# Allegro board 180-10114-04.brd
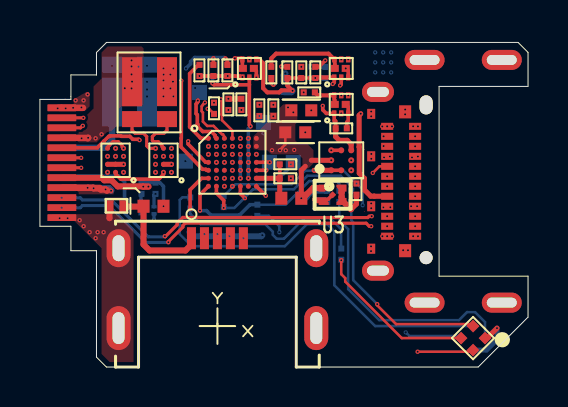
[diagram p0: board, top side]
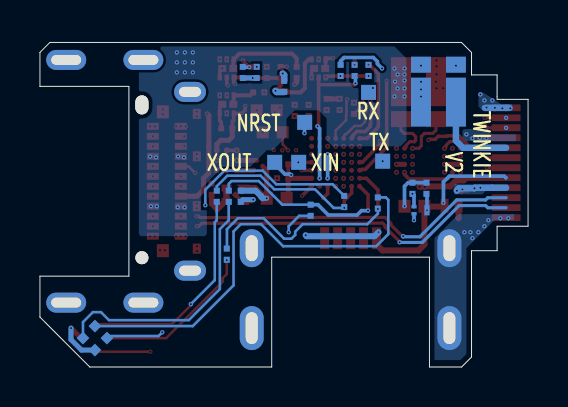
[diagram p1: board, bottom side, seen from below]

Outline 24.44 x 16.25 mm; copper layers: TOP, GND1, SIGNAL_1, SIGNAL_2, PWR1, BOTTOM. Coordinates in mm from the lower left corner of the outline.
Outline path: 0,13.4 1.55,13.4 1.55,14.62 2.83,14.62 2.83,14.62 2.83,15.75 3.33,16.25 23.94,16.25 24.44,15.75 24.44,14.05 19.99,14.05 19.99,4.55 24.44,4.55 24.44,2.5 21.94,0 12.84,0 12.84,5.5 4.94,5.5 4.94,0 3.33,0 2.83,0.5 2.83,5.83 1.55,5.83 1.55,7.05 0,7.05 0,13.4

## Design rules (mm)
net group DIFFPAIR0: nets USB_C_SSRX2_N USB_C_SSRX2_P
net group DIFFPAIR1: nets USB_C_DM USB_C_DP
net group DIFFPAIR2: nets USB_C_SSTX1_N USB_C_SSTX1_P
net group DIFFPAIR3: nets USB_C_CC2_N USB_C_CC2_P
net group DIFFPAIR4: nets USB_C_VBUS_N USB_C_VBUS_P
net group DIFFPAIR5: nets USB_B_DM USB_B_DP
net group DIFFPAIR6: nets USB_C_SSTX2_N USB_C_SSTX2_P
net group DIFFPAIR7: nets USB_C_SSRX1_N USB_C_SSRX1_P

## Placement (name value [footprint] x y rotation side)
C1  -  [CAPC05025X13N]  15.85 8.91 90 top
C2  -  [CAPC1005X71N]  13.09 12.85 0 top
C3  -  [CAPC1005X71N]  12.79 11.75 0 top
C4  -  [CAPC05025X13N]  14.39 8.55 270 bottom
C5  -  [CAPC05025X13N]  11.69 12.85 90 top
C6  -  [CAPC05025X13N]  8.72 12.95 90 top
C7  -  [CAPC05025X13N]  12.29 9.45 0 top
C8  -  [CAPC05025X13N]  12.29 10.15 0 top
CN1  -  [MOLEX_SD-47642-001-5N]  8.89 3.4 0 top
D1  -  [DIOM_1-075X0-675_0-53]  3.83 8.07 180 top
DS1  RGB  [LED_SMLP34RGB2W]  21.69 1.45 315 bottom
DS2  RGB  [LED_SMLP34RGB2W]  21.69 1.45 315 top
FB1  -  [FBC1005X50N]  12.59 8.45 180 top
FB2  -  [FBC1005X50N]  5.69 8.05 0 top
J1  -  [NEWARK_PLUG]  0.94 7.48 0 top
J2  -  [MID-MOUNT-DUAL_SMT]  17.39 6.55 270 top
NOREF  -  []  5.48 9.51 0 top
NOREF#2  -  []  14.76 14.95 0 top
NOREF#3  -  []  5.48 11.19 270 top
NOREF#4  -  []  6.59 10.95 270 top
NOREF#5  -  []  0.91 13.4 90 top
NOREF#6  -  []  0 7.05 90 top
NOREF#7  -  []  3.08 9.51 0 top
NOREF#8  -  []  19.01 0 90 top
NOREF#9  -  []  14.2 11.06 0 top
NOREF#10  -  []  16.93 4.83 90 top
NOREF#11  -  []  15.66 12.62 90 top
NOREF#12  -  []  4.19 10.95 270 top
NOREF#13  -  []  19.99 4.55 90 top
NOREF#14  -  []  3.48 8.07 0 top
NOREF#15  -  []  19.99 9.24 0 top
NOREF#16  -  []  6.18 14.91 0 top
NOREF#17  -  []  14.2 9.64 90 top
NOREF#18  -  []  23.13 3.23 90 top
NOREF#19  -  []  3.61 15.14 0 top
NOREF#20  -  []  3.08 11.19 270 top
NOREF#21  -  []  4.61 12.41 90 top
NOREF#22  -  []  0.95 13.4 90 top
NOREF#23  -  []  19.26 3.23 0 top
NOREF#24  -  []  0.21 13.85 0 top
NOREF#25  -  []  11.06 15.48 270 top
NOREF#26  -  []  8.44 9.05 90 top
NOREF#27  -  []  4.61 15.45 90 top
NOREF#28  -  []  14.74 12.7 90 top
NOREF#29  -  []  1.55 14.54 0 top
NOREF#30  -  []  4.61 12.41 0 top
NOREF#31  -  []  9.91 15.48 0 top
NOREF#32  -  []  15.66 14.42 90 top
NOREF#33  -  []  14.74 14.5 90 top
NOREF#34  -  []  19.34 5.48 90 top
NOREF#35  -  []  14.51 15.48 0 top
NOREF#36  -  []  3.61 13.26 90 top
NOREF#37  -  []  17.39 6.55 0 top
NOREF#38  -  []  2.83 1.11 0 top
NOREF#39  -  []  0 7.75 0 top
NOREF#40  -  []  4.37 7.33 90 top
NOREF#41  -  []  7.98 8.68 0 top
NOREF#42  -  []  10.49 14.5 0 top
NOREF#43  -  []  10.14 15.4 270 top
NOREF#44  -  []  -340.29 -50.77 0 top
NOREF#45  -  []  4.94 5.5 0 top
NOREF#46  -  []  -0.01 12.55 0 top
NOREF#47  -  []  4.61 17.2 0 top
NOREF#48  -  []  14.76 13.15 0 top
NOREF#49  -  []  16.59 8.05 90 top
NOREF#50  -  []  5.71 8.03 270 top
NOREF#51  -  []  3.89 0 90 top
NOREF#52  -  []  10.16 14.95 0 top
NOREF#53  -  []  15.09 14.5 0 top
NOREF#54  -  []  23.06 4.54 90 top
NOREF#55  -  []  5.18 14.96 0 top
NOREF#56  -  []  2.83 15.03 0 top
NOREF#57  -  []  15.09 9.85 0 top
NOREF#58  -  []  1.92 5.83 90 top
NOREF#59  -  []  12.84 0 0 top
NOREF#60  -  []  14.51 13.67 0 top
NOREF#61  -  []  14.59 9.85 0 top
NOREF#62  -  []  11.29 8.68 90 top
NOREF#63  -  []  -402.86 -321.21 0 top
NOREF#64  -  []  5.06 7.85 90 top
NOREF#65  -  []  18.39 225.92 0 top
NOREF#66  -  []  3.61 12.1 90 top
NOREF#67  -  []  1.55 6.16 0 top
NOREF#68  -  []  16.59 10.55 90 top
NOREF#69  -  []  4.37 7.33 0 top
NOREF#70  -  []  15.09 12.7 0 top
Q1  -  [SON035P_1-15X1-05_0-40_8N]  10.49 14.95 90 top
Q2  -  [SON035P_1-15X1-05_0-40_8N]  15.09 13.15 90 top
Q3  -  [SON035P_1-15X1-05_0-40_8N]  15.09 14.95 90 top
Q4  -  [SON350P640X1040X350_3N]  5.39 7.85 270 bottom
R1  -  [RESC1206X75N-4P]  5.49 13.75 270 top
R2  -  [RESC1206X75N-4P]  4.49 13.8 90 bottom
R3  -  [RESC05025X23N]  8.69 14.85 270 top
R4  -  [RESC05025X23N]  14.29 14.75 270 bottom
R5  -  [RESC05025X23N]  9.39 14.85 90 bottom
R6  -  [RESC05025X23N]  13.59 14.75 90 bottom
R7  -  [RESC05025X23N]  7.99 14.85 270 top
R8  -  [RESC05025X23N]  12.21 14.05 270 bottom
R9  -  [RESC05025X23N]  9.39 14.85 90 top
R10  -  [RESC05025X23N]  12.39 14.75 90 top
R11  -  [RESC05025X23N]  7.99 14.85 270 bottom
R12  -  [RESC05025X23N]  13.09 14.75 270 top
R13  -  [RESC05025X23N]  13.49 13.75 0 top
R14  -  [RESC05025X23N]  15.09 11.95 0 top
R15  -  [RESC05025X23N]  11.59 14.75 90 top
R16  -  [RESC05025X23N]  13.79 14.75 90 top
R17  -  [RESC05025X23N]  8.69 14.85 90 bottom
R18  -  [RESC05025X23N]  10.99 12.85 270 top
R19  -  [RESC05025X23N]  14.99 8.55 90 bottom
R20  -  [RESC05025X23N]  9.21 8.29 270 bottom
R21  -  [RESC05025X23N]  7.52 8.21 270 bottom
R22  -  [RESC05025X23N]  5.79 8.95 270 bottom
R23  -  [RESC05025X23N]  5.09 8.95 270 bottom
R24  -  [RESC05025X23N]  9.44 13.15 270 top
R25  -  [RESC05025X23N]  10.09 13.15 270 top
R26  -  [RESC05025X23N]  10.89 7.85 90 bottom
R27  -  [RESC05025X23N]  15.59 8.55 90 bottom
R28  -  [RESC05025X23N]  15.09 5.65 90 bottom
TP1  -  [TP075]  11.49 10.25 180 bottom
TP2  -  [TP075]  12.69 10.25 180 bottom
TP3  -  [TP075]  7.28 10.31 180 bottom
TP4  -  [TP075]  7.99 13.75 180 bottom
TP5  -  [TP075]  11.19 12.25 180 bottom
U1  -  [BGA04P_1-418X1-675_0-625_12N]  6.19 10.35 180 top
U2  -  [BGA04P_1-418X1-675_0-625_12N]  3.79 10.35 180 top
U3  -  [SON65P100X100X40-5N]  14.65 8.62 270 top
U4  -  [BGA040P_3-31X3-14_0-585_49N]  9.64 10.25 0 top
U5  -  [BGA8C050P3X3_1430X1775X0595]  15.09 10.35 90 top

## Library data of the parts
C1 C7 = CAP: alternate symbols: (); part number: CAP_0201-100-10082-00,1UF,6.3V,X5R,20%,150-00004-00
C2 C3 = CAP: alternate symbols: (); part number: CAP_0402-100-10045-00,4.7UF,10V,X5R,20%,150-00039-00
C4-C6 = CAP: alternate symbols: (); part number: CAP_0201-100-10039-00,100NF,10V,X5R,10%,150-00007-00
C8 = CAP: alternate symbols: (); part number: CAP_0201-100-00379-00,10NF,10V,X5R,10%,150-00175-00
CN1 = USB_TYPE_MICRO_B: part number: USB_TYPE_MICRO_B_RA_SMT-MOLEX,47642-0001,140-10205-00
D1 = ZENER: part number: ZENER_DFN1006-5.6V,5MA,0.9V,BZT52C5V6LP-7,150-10082-00,DIODES INC
DS1 DS2 = LED: User Part Number: PARTNUM*; part number: LED_SMLP34-TRI-COLOR,2.2V RED, 3.3V GREEN, 3.2V BLUE TYPICAL,0.2MM,150-10034-00,ROHM,SMLP34RGB2W
FB1 FB2 = FERRITE: alternate symbols: (); part number: FERRITE_0402-104-10036-00,600@100MHZ,0.52OHM,185-00019-00
J1 = USB3_TYPE_C: part number: USB3_TYPE_C_PLUG-FOXCONN,TBD,140-10293-00
J2 = USB3_TYPE_C: part number: USB3_TYPE_C_MIDMOUNT_DUAL_SMT-FOXCONN,UT12123-1A50A-7H,140-10308-00
Q1-Q3 = PMDXB600UNE: part number: PMDXB600UNE_SOT1216-NXP,PMDXB600UNE,150-10050-00
Q4 = NMOS: part number: NMOS_0402-12V,2.1A,0.225OHM,1.06NC,TI,CSD13381F4,151-10044-00
R1 R2 = RES_SENSE: part number: RES_SENSE_RS1206_4P_SWAP-0.015,0.5%,1W,150PPM,RL1632L4-R015-DN,102-13359-00,CYNTEC
R3 R4 = RES: alternate symbols: (); part number: RES_0201-102-12863-00,4.75K,0.050W,1%
R5 R6 = RES: alternate symbols: (); part number: RES_0201-102-13067-00,1K,0.050W,1%
R7 R8 = RES: alternate symbols: (); part number: RES_0201-102-12797-00,12.1K,0.050W,1%
R9 R10 = RES: alternate symbols: (); part number: RES_0201-102-13135-00,5.11K,0.050W,1%
R11 R12 = RES: alternate symbols: (); part number: RES_0201-102-13216-00,35.7K,0.050W,1%
R13 R15 = RES: alternate symbols: (); part number: RES_0201-102-12868-00,200,0.050W,1%
R14 R16 = RES: alternate symbols: (); part number: RES_0201-102-12867-00,100,0.050W,1%
R17 R18 = RES: alternate symbols: (); part number: RES_0201-102-13305-00,301K,0.050W,1%
R19 R26 = RES: alternate symbols: (); part number: RES_0201-102-13058-00,806,0.050W,1%
R20 R27 = RES: alternate symbols: (); part number: RES_0201-102-13044-00,576,0.050W,1%
R21 R28 = RES: alternate symbols: (); part number: RES_0201-102-13046-00,604,0.050W,1%
R22 R23 = RES: alternate symbols: (); part number: RES_0201-102-13231-00,51.1K,0.050W,1%
R24 R25 = RES: alternate symbols: (); part number: RES_0201-102-13100-00,2.21K,0.050W,1%
TP1-TP5 = TESTPOINT: part number: TESTPOINT_30X30MIL_SMT-160-00003-00,N/A,N/A
U1 U2 = INA231: part number: INA231_BGA12-TI,INA231AIYFFR,110-10493-00
U3 = MIC550X: part number: MIC550X_DFN4-MICREL,MIC5504-3.3YMT,300MA LOW IQ LDO,110-10600-00,3.3V; tolerance: 2.0%
U4 = STM32F072XX: part number: STM32F072XX_WLCSP49-ST MICRO,STM32F072CBY6,110-10525-00
U5 = OPAMP_GENERIC: part number: OPAMP_GENERIC_DUAL_WLCSP8-ANALOG,AD8606ACB,110-10560-00

## Footprints (pads in the part's own frame, mm; a bottom-side part is the same pattern mirrored in y, then rotated)
BGA04P_1-418X1-675_0-625_12N
  round 0.25 smd: A1(-0.4,0.6) A2(0,0.6) A3(0.4,0.6) B1(-0.4,0.2) B2(0,0.2) B3(0.4,0.2) C1(-0.4,-0.2) C2(0,-0.2) C3(0.4,-0.2) D1(-0.4,-0.6) D2(0,-0.6) D3(0.4,-0.6)
BGA8C050P3X3_1430X1775X0595
  round 0.3 smd: A1(-0.5,0.5) A2(0,0.5) A3(0.5,0.5) B1(-0.5,0) B3(0.5,0) C1(-0.5,-0.5) C2(0,-0.5) C3(0.5,-0.5)
BGA040P_3-31X3-14_0-585_49N
  round 0.25 smd: A1(-1.2,1.2) A2(-0.8,1.2) A3(-0.4,1.2) A4(0,1.2) A5(0.4,1.2) A6(0.8,1.2) A7(1.2,1.2) B1(-1.2,0.8) B2(-0.8,0.8) B3(-0.4,0.8) B4(0,0.8) B5(0.4,0.8) B6(0.8,0.8) B7(1.2,0.8) C1(-1.2,0.4) C2(-0.8,0.4) C3(-0.4,0.4) C4(0,0.4) C5(0.4,0.4) C6(0.8,0.4) C7(1.2,0.4) D1(-1.2,0) D2(-0.8,0) D3(-0.4,0) D4(0,0) D5(0.4,0) D6(0.8,0) D7(1.2,0) E1(-1.2,-0.4) E2(-0.8,-0.4) E3(-0.4,-0.4) E4(0,-0.4) E5(0.4,-0.4) E6(0.8,-0.4) E7(1.2,-0.4) F1(-1.2,-0.8) F2(-0.8,-0.8) F3(-0.4,-0.8) F4(0,-0.8) F5(0.4,-0.8) F6(0.8,-0.8) F7(1.2,-0.8) G1(-1.2,-1.2) G2(-0.8,-1.2) G3(-0.4,-1.2) G4(0,-1.2) G5(0.4,-1.2) G6(0.8,-1.2) G7(1.2,-1.2)
CAPC1005X71N
  rect 0.6x0.6 smd: 1(-0.5,0) 2(0.5,0)
CAPC05025X13N
  rect 0.3x0.3 smd: 1(-0.28,0) 2(0.28,0)
DIOM_1-075X0-675_0-53
  rect 0.4x0.7 smd: A(0.35,0) K(-0.35,0)
FBC1005X50N
  rect 0.6x0.65 smd: 1(-0.5,0) 2(0.5,0)
LED_SMLP34RGB2W
  rect 0.45x0.45 smd: 1(0.425,0.425) 2(0.425,-0.425) 3(-0.425,-0.425) 4(-0.425,0.425)
MID-MOUNT-DUAL_SMT
  oval 0.95x0.65 hole 0.95x0.65 unplated: (-6.574,1.95)
  round 0.65 hole 0.65 unplated: (1.075,1.95)
  rect 0.35x0.6 smd: A1(0,0) A2(-0.5,0) A3(-1,0) A4(-1.5,0) A5(-2,0) A6(-2.5,0) A7(-3,0) A8(-3.5,0) A9(-4,0) A10(-4.5,0) A11(-5,0) A12(-5.5,0) B1(-5.5,1.4) B2(-5,1.4) B3(-4.5,1.4) B4(-4,1.4) B5(-3.5,1.4) B6(-3,1.4) B7(-2.5,1.4) B8(-2,1.4) B9(-1.5,1.4) B10(-1,1.4) B11(-0.5,1.4) B12(0,1.4)
  oval 1x1.6 hole 0.5x1.1: G1(-7.225,-0.46) G2(1.724,-0.46)
  oval 1x2 hole 0.5x1.5: G3(3.325,1.875) G4(3.325,5.74) G5(-8.825,1.875) G6(-8.825,5.74)
  rect 0.5x0.4 smd: G7(-6.125,-0.8) G8(-4,-0.8) G9(-1.5,-0.8) G10(0.625,-0.8)
  rect 0.65x0.6 smd: G11(0.725,0.9) G12(-6.225,0.9)
  rect 0.025x0.025 smd: G13(-1.25,-1.15) G14(-4.34,-1.15)
MOLEX_SD-47642-001-5N
  rect 0.45x1.1 smd: 1(-1.3,3.05) 2(-0.65,3.05) 3(0,3.05) 4(0.65,3.05) 5(1.3,3.05)
  oval 1.2x2.2 hole 0.6x1.6: G1(-4.95,-1.45) G2(4.95,-1.45)
  oval 1.2x1.9 hole 0.6x1.3: G3(-4.95,2.55) G4(4.95,2.55)
NEWARK_PLUG
  rect 1.425x0.325 smd: A1(0.163,0) A2(0.163,0.5) A3(0.163,1) A4(0.163,1.5) A5(0.163,2) A6(0.163,2.5) A7(0.163,3) A8(0.163,3.5) A9(0.163,4) A10(0.163,4.5) A11(0.163,5) A12(0.163,5.5) B1(0.163,5.5) B2(0.163,5) B3(0.163,4.5) B4(0.163,4) B5(0.163,3.5) B6(0.163,3) B7(0.163,2.5) B8(0.163,2) B9(0.163,1.5) B10(0.163,1) B11(0.163,0.5) B12(0.163,0)
RESC1206X75N-4P
  rect 2.45x1 smd: 1(-0.537,0.875) 2(-0.537,-0.875)
  rect 0.8x1 smd: 3(1.337,-0.875) 4(1.337,0.875)
RESC05025X23N
  rect 0.3x0.3 smd: 1(-0.28,0) 2(0.28,0)
SON035P_1-15X1-05_0-40_8N
  rect 0.3x0.22 smd: 1(-0.452,0.35) 2(-0.452,0) 3(-0.452,-0.35) 4(0.452,-0.35) 5(0.452,0) 6(0.452,0.35)
  rect 0.35x0.4 smd: 7(0,0.325) 8(0,-0.225)
SON65P100X100X40-5N
  custom 0.35x0.64 smd: 1(-0.335,-0.375)
  custom 0.35x0.5 smd: 2(0.335,-0.445) 3(0.335,0.445) 4(-0.335,0.445)
  rect 0.25x0.25 smd rot 135: 5(0,0)
SON350P640X1040X350_3N
  rect 0.51x0.26 smd: D(0,0.325)
  rect 0.16x0.26 smd: G(-0.175,-0.325) S(0.175,-0.325)
TP075
  rect 0.75x0.75 smd: 1(0,0)

## Nets
GND: C1.2 C2.2 C3.2 C4.2 C5.2 C6.2 C7.2 C8.2 CN1.5(GND) CN1.G1 CN1.G2 CN1.G3 CN1.G4 D1.A J1.A1(GND1) J1.A12(GND2) J1.B1(GND3) J1.B12(GND4) J2.A1(GND1) J2.A12(GND2) J2.B1(GND3) J2.B12(GND4) J2.G1(SHIELD1) J2.G2(SHIELD2) J2.G3(SHIELD3) J2.G4(SHIELD4) J2.G5(SHIELD5) J2.G6(SHIELD6) J2.G7(SHIELD7) J2.G8(SHIELD8) J2.G9(SHIELD9) J2.G10(SHIELD10) J2.G11(SHIELD11) J2.G12(SHIELD12) Q2.4(S2) Q3.4(S2) Q4.S R17.2 R18.2 U1.B3(A0) U1.C1(GND) U1.C2(NC_C2) U1.C3(A1) U2.C1(GND) U2.C2(NC_C2) U2.C3(A1) U3.2(GND) U3.5(PAD) U4.A6(VSS3) U4.B1(VSS2) U4.B6(NC) U4.D3(VSS1) U4.E6(VSSA) U5.C2(VSS)
VBUS_ALERT_L: U1.A3(ALERT) U4.G3(PB2)
BOOT: Q4.D R23.2 U4.A5(BOOT0)
CC1: Q1.1(S1) Q2.1(S1) R3.2 R5.1 R7.2 R9.1 R11.2 R14.1 U5.C3(IN_P)
CC1_BUF: U4.G7(PA1) U5.A3(OUT) U5.B3(IN_N)
CC1_EN: Q1.2(G1) R17.1 U4.F6(PA0)
CC1_RA: R5.2 U4.D1(PA8)
CC1_RD: R9.2 U4.B4(PB5)
CC1_RP1A5: R7.1 U4.A1(PA14)
CC1_RP3A0: R3.1 U4.A2(PA15)
CC1_RPUSB: R11.1 U4.B3(PA13)
CC1_TX_DATA: Q2.2(G1) U4.A4(PB4)
CC1_TX_EN: Q2.5(G2) U4.G4(PB1)
CC2: Q1.4(S2) Q3.1(S1) R4.2 R6.1 R8.2 R10.1 R12.2 R16.1 U5.C1(IN_P)
CC2_ALERT_L: U2.A3(ALERT) U4.F3(PA7)
CC2_BUF: U4.E4(PA3) U5.A1(OUT) U5.B1(IN_N)
CC2_EN: Q1.5(G2) R18.1 U4.E5(PA2)
CC2_RA: R6.2 U4.E1(PB15)
CC2_RD: R10.2 U4.B5(PB8)
CC2_RP1A5: R8.1 U4.C7(PC14_OSC32_IN)
CC2_RP3A0: R4.1 U4.C6(PC15_OSC32_OUT)
CC2_RPUSB: R12.1 U4.G5(PB0)
CC2_TX_DATA: Q3.2(G1) U4.F4(PA6)
CC2_TX_EN: Q3.5(G2) U4.A3(PB3)
DAC: U4.G6(PA4)
LED_B_L: R21.2 R28.2 U4.F1(PB14)
LED_G_L: R20.2 R27.2 U4.G2(PB11)
LED_R_L: R19.2 R26.2 U4.G1(PB13)
NRST: TP5.1(A) U4.E7(NRST)
OSC_IN: TP1.1(A) U4.D7(PF0_OSC_IN)
OSC_OUT: TP2.1(A) U4.D6(PF1_OSC_OUT)
PP3300: C2.1 C3.1 C4.1 C5.1 C6.1 FB1.1 R13.1 R15.1 R24.1 R25.1 U1.B1(VS) U1.B2(NC_B2) U2.B1(VS) U2.B2(NC_B2) U2.B3(A0) U3.1(OUT) U4.A7(VDD2) U4.B2(VDDIO2) U4.B7(VBAT) U4.F2(VDD1) U5.A2(VDD)
SCL: R24.2 U1.A1(SCL) U2.A1(SCL) U4.C4(PB6)
SDA: R25.2 U1.A2(SDA) U2.A2(SDA) U4.D4(PB7)
TX_CLKIN: U4.C5(PB9) U4.F5(PA5)
UART_RX: TP4.1(A) U4.C2(PA10)
UART_TX: TP3.1(A) U4.D2(PA9)
UNNAMED_2_CAP_I50_1: C7.1 C8.1 FB1.2 U4.F7(VDDA)
UNNAMED_2_LED_I88_BK: DS1.3(BK) R21.1
UNNAMED_2_LED_I88_GK: DS1.4(GK) R20.1
UNNAMED_2_LED_I88_RK: DS1.2(RK) R19.1
UNNAMED_2_LED_I99_BK: DS2.3(BK) R28.1
UNNAMED_2_LED_I99_GK: DS2.4(GK) R27.1
UNNAMED_2_LED_I99_RK: DS2.2(RK) R26.1
UNNAMED_2_PMDXB600UNE_I30_D11: Q2.6(D1_1) Q2.7(D1_2) R13.2
UNNAMED_2_PMDXB600UNE_I31_D21: Q2.3(D2_1) Q2.8(D2_2) R14.2
UNNAMED_2_PMDXB600UNE_I36_D11: Q3.6(D1_1) Q3.7(D1_2) R15.2
UNNAMED_2_PMDXB600UNE_I38_D21: Q3.3(D2_1) Q3.8(D2_2) R16.2
USB_B_DM: CN1.2(D-) U4.C1(PA11)
USB_B_DP: CN1.3(D+) U4.C3(PA12)
USB_B_ID: CN1.4(ID) Q4.G R22.2
USB_B_VBUS: C1.1 DS1.1(CA) DS2.1(CA) FB2.2 R22.1 R23.1 U3.3(EN) U3.4(IN)
USB_B_VBUS_CONN: CN1.1(VBUS) D1.K FB2.1
USB_C_CC1: J1.A5(CC1) J2.A5(CC1) Q1.6(D1_1) Q1.7(D1_2)
USB_C_CC2_N: R2.4(3) U2.D2(VIN_N)
USB_C_CC2_P: R2.3(4) U2.D1(BUS) U2.D3(VIN_P)
USB_C_DM: J1.A7(DM1) J2.A7(DM1) J2.B7(DM2)
USB_C_DP: J1.A6(DP1) J2.A6(DP1) J2.B6(DP2)
USB_C_PLUG_CC2: J1.B5(CC2) R2.2(1)
USB_C_PLUG_VBUS: J1.A4(VBUS1) J1.A9(VBUS2) J1.B4(VBUS3) J1.B9(VBUS4) R1.2(1)
USB_C_RECEP_CC2: J2.B5(CC2) Q1.3(D2_1) Q1.8(D2_2) R2.1(2)
USB_C_RECEP_VBUS: J2.A4(VBUS1) J2.A9(VBUS2) J2.B4(VBUS3) J2.B9(VBUS4) J2.G13(SHIELD13) J2.G14(SHIELD14) R1.1(2)
USB_C_RFU1: J1.A8(RFU1) J2.A8(RFU1)
USB_C_RFU2: J1.B8(RFU2) J2.B8(RFU2)
USB_C_SSRX1_N: J1.B10(SSRX1_N) J2.B10(SSRX1_N)
USB_C_SSRX1_P: J1.B11(SSRX1_P) J2.B11(SSRX1_P)
USB_C_SSRX2_N: J1.A10(SSRX2_N) J2.A10(SSRX2_N)
USB_C_SSRX2_P: J1.A11(SSRX2_P) J2.A11(SSRX2_P)
USB_C_SSTX1_N: J1.A3(SSTX1_N) J2.A3(SSTX1_N)
USB_C_SSTX1_P: J1.A2(SSTX1_P) J2.A2(SSTX1_P)
USB_C_SSTX2_N: J1.B3(SSTX2_N) J2.B3(SSTX2_N)
USB_C_SSTX2_P: J1.B2(SSTX2_P) J2.B2(SSTX2_P)
USB_C_VBUS_N: R1.4(3) U1.D2(VIN_N)
USB_C_VBUS_P: R1.3(4) U1.D1(BUS) U1.D3(VIN_P)

Pads without a net: J1 B6 B7; U4 D5 E2 E3

## Via types
v1: diameter 0.22, hole 0.1, TOP to GND1, 221 vias
v2: diameter 0.22, hole 0.1, GND1 to SIGNAL_1, 176 vias
v3: diameter 0.22, hole 0.1, SIGNAL_1 to SIGNAL_2, 159 vias
v4: diameter 0.22, hole 0.1, SIGNAL_2 to PWR1, 110 vias
v5: diameter 0.22, hole 0.1, PWR1 to BOTTOM, 97 vias

## Routing (per net, layer and track width the routed paths; a pad name or vN(x,y) marks a point on that pad's centre or on a via; arc(x,y) is an arc through that point)
GND: length 5.6
  TOP w0.178: U3.5 14.43,8.4 13.74,8.4 13.74,8.39 13.75,8.39 13.75,8.38 v5(13.76,8.38) 13.85,8.29 U3.2
  TOP w0.3: D1.A 3.48,7.45 3.48,7.45
  TOP w0.32: 2.15,12.98 v5(1.66,12.98) J1.A12 0.94,12.98
  BOTTOM w0.178: 5.71,7.67 v5(5.71,7.35)
  BOTTOM w0.25: v5(13.76,8.38) 14.28,8.38 C4.2
  BOTTOM w0.32: 0.94,12.98 J1.A12 v5(1.66,12.98) 2.16,12.98
  vias: v1(0.89,12.95) v1(0.99,7.45) v1(1.29,12.95) v1(1.39,7.45) v1(1.79,13.35) v1(1.99,7.35) v1(2.08,12.99) v1(2.19,13.35) v1(2.19,7.05) v1(2.39,13.65) v1(2.49,6.75) v1(2.79,6.45) v1(2.89,6.75) v1(3.19,6.75) v1(3.39,10.55) v1(3.79,10.55) v1(4.19,10.55) v1(5.79,10.55) v1(5.79,10.15) v1(6.19,10.55) v1(6.59,10.55) v1(8.44,11.05) v1(8.72,13.23) v1(9.24,10.25) v1(10.19,6.45) v1(10.44,11.45) v1(10.44,11.05) v1(10.44,9.85) v1(10.99,12.57) v1(11.69,13.13) v1(12.57,10.15) v1(12.57,9.45) v1(13.29,11.75) v1(13.59,12.85) v1(15.44,15.4) v1(15.44,13.6) v1(15.59,10.35) v1(15.85,9.19) v1(16.59,12.79) v1(16.59,12.55) v1(16.59,10.67) v1(16.59,10.43) v1(16.59,8.19) v1(16.59,7.95) v1(16.58,6.04) v1(16.58,5.8) v1(17.14,12.05) v1(17.15,6.55) v1(17.39,12.05) v1(17.39,6.55) v1(17.63,12.05) v1(17.63,6.55) v1(18.19,5.85) v1(18.29,12.89) v1(18.29,12.65) v1(18.43,5.85) v1(18.69,12.05) v1(18.69,6.55) v1(18.93,12.05) v1(18.93,6.55) v2(0.89,12.95) v2(0.99,7.45) v2(1.29,12.95) v2(1.39,7.45) v2(1.79,13.35) v2(1.99,7.35) v2(2.08,12.99) v2(2.19,13.35) v2(2.19,7.05) v2(2.39,13.65) v2(2.49,6.75) v2(2.79,6.45) v2(2.89,6.75) v2(3.19,6.75) v2(8.69,15.13) v3(0.89,12.95) v3(0.99,7.45) v3(1.29,12.95) v3(1.39,7.45) v3(1.79,13.35) v3(1.99,7.35) v3(2.08,12.99) v3(2.19,13.35) v3(2.19,7.05) v3(2.39,13.65) v3(2.49,6.75) v3(2.79,6.45) v3(2.89,6.75) v3(3.19,6.75) v3(8.69,15.13) v4(0.89,12.95) v4(0.99,7.45) v4(1.29,12.95) v4(1.39,7.45) v4(1.79,13.35) v4(1.99,7.35) v4(2.08,12.99) v4(2.19,13.35) v4(2.19,7.05) v4(2.39,13.65) v4(2.49,6.75) v4(2.79,6.45) v4(2.89,6.75) v4(3.19,6.75) v4(8.69,15.13) v5(0.89,12.95) v5(0.99,7.45) v5(1.29,12.95) v5(1.39,7.45) v5(1.79,13.35) v5(1.99,7.35) v5(2.08,12.99) v5(2.19,13.35) v5(2.19,7.05) v5(2.39,13.65) v5(2.49,6.75) v5(2.79,6.45) v5(2.89,6.75) v5(3.19,6.75) v5(8.69,15.13)
VBUS_ALERT_L: length 3.9
  SIGNAL_1 w0.089: v2(9.24,9.05) 9.04,8.85 v3(7.19,8.85)
  SIGNAL_2 w0.089: v3(5.79,9.75) 6.69,8.85 v3(7.19,8.85)
BOOT: length 9
  SIGNAL_1 w0.089: v2(10.04,11.45) 9.89,11.31 8.73,11.31 7.99,10.56 7.18,10.56 7.02,10.41 6.48,10.41 6.34,10.26 5.52,10.26 v3(5.36,10.43)
  SIGNAL_2 w0.089: v3(5.36,10.43) 4.77,9.84 4.77,8.14 v5(5.06,7.85)
  BOTTOM w0.178: R23.2 5.06,8.65 v5(5.06,7.85)
CC1: length 11.1
  TOP w0.178: v5(7.99,14.57) R3.2 R9.1 v5(9.4,14.57) 9.75,14.57 9.76,14.56 10.01,14.56 10.08,14.5 Q1.1 ; v3(14.16,13.08) 14.16,12.88 14.34,12.7 Q2.1 14.74,12.33 14.76,12.32 14.81,12.32 R14.1
  TOP w0.25: U5.C3 15.59,11.15 15.39,11.35 14.99,11.35 14.81,11.53 R14.1
  SIGNAL_1 w0.089: v2(10.14,14.52) 10.44,14.21 10.95,14.21 11.17,14.43 13.31,14.43 13.65,14.09 14.25,14.09 v3(14.29,14.05) 14.29,14.05
  SIGNAL_2 w0.25: v3(14.29,14.05) 14.16,13.93 v3(14.16,13.08)
  BOTTOM w0.178: v5(9.4,14.57) R9.1
CC1_BUF: length 5.8
  TOP w0.178: U5.B3 v3(14.59,10.85) ; U4.G7 v3(11.31,8.58)
  SIGNAL_2 w0.089: v3(11.31,8.58) 12.84,8.58 12.99,8.73 13.22,8.73 14.16,9.67 14.16,10.43 v3(14.59,10.85)
CC1_EN: length 7.4
  TOP w0.178: v5(8.64,14.2) 8.71,14.13 10.49,14.13 ; 10.49,14.13 10.49,12.11 v5(10.55,12.05) ; 10.49,14.13 Q1.2
  BOTTOM w0.178: v5(10.44,9.45) 10.44,11.94 v5(10.55,12.05) ; v5(8.64,14.2) 8.64,14.53 R17.1
CC1_RA: length 7.9
  TOP w0.178: U4.D1 8.3,10.25 7.42,11.16 v3(7.43,11.3)
  SIGNAL_2 w0.089: v5(7.31,14.95) 7.31,13.65 7.29,13.64 7.29,11.88 7.43,11.75 v3(7.43,11.3)
  BOTTOM w0.178: R5.2 9.39,15.32 9.21,15.5 7.75,15.5 7.54,15.29 7.54,15.18 v5(7.31,14.95)
CC1_RD: length 5
  TOP w0.178: v3(9.29,15.45) 9.39,15.35 R9.2
  SIGNAL_2 w0.089: v3(9.29,15.45) 9.3,15.43 9.3,14.85 9.15,14.69 9.15,11.54 v3(9.64,11.05)
CC1_RP1A5: length 4.5
  TOP w0.178: U4.A1 8.07,11.45 8.03,11.49 8.02,11.49 7.6,11.91 7.6,11.91 7.5,12.02 7.5,14.68 7.94,15.13 R7.1
CC1_RP3A0: length 5.4
  TOP w0.178: v3(7.91,13.34) 7.91,13.28 7.88,13.26 7.88,13.23 7.82,13.17 7.82,12.69 7.88,12.63 7.88,12.17 7.91,12.14 7.91,12.04 8.15,11.79 8.58,11.79 8.78,11.59 8.78,11.51 U4.A2 ; v3(8.69,15.45) R3.1
  SIGNAL_2 w0.089: v3(7.91,13.34) 8.3,13.73 8.3,15.1 8.65,15.45 v3(8.69,15.45)
CC1_RPUSB: length 5.1
  SIGNAL_2 w0.089: v5(7.99,15.13) 7.73,14.87 7.73,14.37 8.03,14.08 8.03,13.86 7.65,13.49 7.65,12.64 v3(9.24,11.05)
CC1_TX_DATA: length 9
  TOP w0.127: U4.A4 9.64,11.84 9.11,12.36 9.11,12.62 9.1,12.64 9.1,13.37 v2(9.06,13.41)
  SIGNAL_1 w0.089: v2(9.06,13.41) 9.12,13.34 9.16,13.34 9.38,13.13 10.63,13.13 10.89,12.87 11.88,12.87 12.03,13.03 12.03,13.16 12.16,13.3 13.98,13.3 14.04,13.36 14.36,13.36 14.68,13.04 14.74,13.04 v2(15.09,12.7)
CC1_TX_EN: length 10
  SIGNAL_1 w0.089: v3(15.65,10.91) 15.65,10.67 14.89,9.92 14.03,9.92 13.84,10.11 13.62,10.11 13.48,9.97 13.46,9.97 12.52,9.02 9.67,9.02 v2(9.64,9.05)
  SIGNAL_2 w0.089: v3(15.65,10.91) 15.09,11.47 v3(15.09,13.6)
CC2: length 12.8
  TOP w0.178: v3(14.67,14.17) 14.74,14.24 14.74,14.5 Q3.1 ; v5(13.79,14.47) R12.2 R10.1
  TOP w0.203: Q1.4 10.98,15.4 11.18,15.21 11.18,13.96 11.39,13.75 11.99,13.75 12.09,13.85 12.63,13.85 ; 12.63,13.85 12.39,14.09 R10.1 ; 12.63,13.85 v5(12.65,13.83) ; Q3.1 13.82,14.5 v5(13.79,14.47)
  SIGNAL_2 w0.089: v3(14.67,14.17) 14.65,14.16 14.65,11.15 14.85,10.95 14.85,10.31 15.31,9.85 v3(15.59,9.85)
  BOTTOM w0.25: R6.1 v5(13.79,14.47) R4.2
  BOTTOM w0.32: v5(12.65,13.83) 12.59,13.77 R8.2
CC2_ALERT_L: length 6.2
  SIGNAL_1 w0.089: v2(9.24,9.45) 8.98,9.19 6.49,9.19 6.22,9.47 4.05,9.47 3.77,9.75 v2(3.39,9.75)
CC2_BUF: length 6.3
  TOP w0.178: U5.B1 U5.A1
  TOP w0.25: U5.A1 v3(13.73,9.85)
  SIGNAL_2 w0.089: v3(9.64,9.85) 9.64,9.49 10.02,9.11 12.47,9.11 13.21,9.85 v3(13.73,9.85)
CC2_EN: length 6.2
  SIGNAL_2 w0.089: v3(10.04,9.85) 10.56,10.37 10.56,11.68 10.8,11.92 10.8,12.16 10.79,12.16 10.79,12.93 v3(10.99,13.13) 11.07,13.21 11.07,13.63 11.07,13.64 11.07,14.82 v3(10.49,15.4)
CC2_RA: length 13.9
  TOP w0.178: U4.E1 8.35,9.85 8.31,9.9 8.14,9.9 7.06,11.02 7.07,11.46 7.08,11.46 v2(7.08,14.33)
  SIGNAL_1 w0.089: v2(7.08,14.33) 7.86,14.33 7.88,14.31 8.15,14.31 8.33,14.13 8.35,14.13 8.54,13.95 8.96,13.95 9,13.91 9.67,13.91 9.8,14.04 11.44,14.04 11.58,13.89 11.79,13.89 11.94,14.04 12.03,14.13 13.07,14.13 v3(13.11,14.09)
  SIGNAL_2 w0.203: v3(13.11,14.09) 13.11,14.57 12.77,14.9 12.77,15.16 12.98,15.36 13.29,15.36 13.59,15.07 v5(13.59,15.03)
CC2_RD: length 8.6
  TOP w0.178: R10.2 12.1,15.03 v3(12.09,15.04)
  SIGNAL_1 w0.089: v2(10.04,11.05) 10.32,11.05 10.39,11.12 12.63,11.12 12.63,11.12 12.84,11.12 12.84,11.12 v3(13.14,10.83)
  SIGNAL_2 w0.089: v3(13.14,10.83) 13.21,10.91 13.21,12.83 12.39,13.65 12.39,14.33 12.55,14.49 12.55,14.79 12.54,14.8 12.54,14.9 12.39,15.04 v3(12.09,15.04)
CC2_RP1A5: length 5
  SIGNAL_2 w0.089: v3(10.84,10.65) 10.84,11.71 11.35,12.22 11.35,12.91 12,13.56 12,14.41 v5(12.29,14.7)
  BOTTOM w0.32: v5(12.29,14.7) 12.21,14.62 R8.1
CC2_RP3A0: length 8.3
  SIGNAL_1 w0.089: v2(10.44,10.65) 10.69,10.39 11.23,10.39 11.39,10.55 13.44,10.55 v3(13.69,10.8)
  SIGNAL_2 w0.089: v3(13.69,10.8) 13.69,10.91 13.77,10.99 13.77,14.03 14.09,14.35 14.09,14.69 13.96,14.82 v5(13.96,15.01)
  BOTTOM w0.178: v5(13.96,15.01) 14.27,15.01 R4.1
CC2_RPUSB: length 10.7
  TOP w0.178: U4.G5 10.04,8.68 v2(10.26,8.46)
  SIGNAL_1 w0.089: v2(10.26,8.46) 10.64,8.84 12.59,8.84 12.66,8.91 v3(12.77,8.91)
  SIGNAL_2 w0.089: v3(13.09,15.03) 13.39,14.73 13.39,14.25 13.59,14.05 13.59,11.06 13.44,10.91 13.44,10.7 13.99,10.15 13.99,9.74 13.69,9.45 13.31,9.45 v3(12.77,8.91)
CC2_TX_DATA: length 10.5
  TOP w0.178: v3(15.03,14.1) 15.09,14.15 Q3.2
  SIGNAL_1 w0.089: v2(9.64,9.45) 9.89,9.19 12.43,9.19 13.52,10.28 13.91,10.28 14.1,10.09 14.71,10.09 v3(15.14,10.53)
  SIGNAL_2 w0.089: v3(15.14,10.53) 15.14,11 14.83,11.31 14.83,13.9 v3(15.03,14.1)
CC2_TX_EN: length 11.3
  TOP w0.127: v3(8.26,13.24) 8.16,13.14 8.16,13.12 8.1,13.05 8.1,12.8 8.16,12.74 8.16,12.28 8.37,12.07 8.69,12.07 9,11.77 9.01,11.77 9.12,11.66 9.17,11.66 9.24,11.53 U4.A3
  SIGNAL_1 w0.089: v3(9.05,15.23) 9.15,15.13 9.8,15.13 10.37,15.69 14.8,15.69 v2(15.09,15.4)
  SIGNAL_2 w0.089: v3(8.26,13.24) 8.53,13.51 8.53,13.75 8.73,13.95 8.75,13.95 8.9,14.1 8.9,14.12 8.95,14.17 8.95,14.85 9.05,14.95 v3(9.05,15.23)
LED_B_L: length 12.2
  TOP w0.178: v5(7.52,7.91) 7.52,8.87 8.1,9.45 U4.F1
  BOTTOM w0.127: R28.2 15.08,5.94 15.08,6.9 14.53,7.45 13.24,7.45 12.22,6.42 11.85,6.42 11.66,6.61 11.66,6.78 11.29,7.15 8.05,7.15 7.52,7.68 v5(7.52,7.91)
LED_G_L: length 8.7
  TOP w0.178: v5(9.2,7.97) 9.2,8.34 8.84,8.71 U4.G2
  BOTTOM w0.127: R27.2 15.59,9.05 15.06,9.58 13.39,9.58 12.71,8.9 10.67,8.9 9.74,7.97 v5(9.2,7.97)
LED_R_L: length 9.6
  TOP w0.178: U4.G1 8.01,8.63 v5(8.01,7.83)
  BOTTOM w0.127: R26.2 12.31,8.13 13.49,9.31 14.85,9.31 14.99,9.17 R19.2
  BOTTOM w0.178: v5(8.01,7.83) 8.34,7.83 8.56,7.61 10,7.61 10.52,8.13 R26.2
NRST: length 3
  TOP w0.178: U4.E7 v3(11.34,9.85)
  SIGNAL_2 w0.089: v5(11.2,11.71) 11.2,9.99 v3(11.34,9.85)
  BOTTOM w0.178: v5(11.2,11.71) 11.2,12.24 TP5.1
OSC_IN: length 0.7
  TOP w0.178: U4.D7 v5(11.51,10.25)
  BOTTOM w0.178: v5(11.51,10.25) TP1.1
OSC_OUT: length 2.8
  SIGNAL_1 w0.089: v2(10.44,10.25) 11.09,9.59 11.56,9.59 11.58,9.62 v5(11.87,9.62)
  BOTTOM w0.178: v5(11.87,9.62) 11.88,9.62 11.93,9.66 12.18,9.66 12.69,10.17 TP2.1
PP3300: length 9.2
  TOP w0.127: C3.1 12.29,11.15 12.12,10.98 12.12,10.95 v4(12.02,10.86) ; C6.1 8.5,12.89 8.49,12.89 8.45,12.93 v4(8.4,12.93)
  TOP w0.25: 13.29,10.05 13.09,9.85 v5(13.09,8.45) ; U2.B3 U2.B2 v4(4.19,10.15) ; R15.1 11.59,14.25 v4(11.69,14.15) ; R25.1 9.83,13.43 9.82,13.42 9.49,13.42 9.48,13.43 v4(9.44,13.43) ; v4(14.59,10.35) 13.59,10.35 ; U1.B2 v4(6.59,10.15)
  TOP w0.3: U3.1 13.67,8.96 13.32,8.61 13.25,8.61 v5(13.09,8.45)
  BOTTOM w0.25: v5(13.09,8.45) 13.29,8.45
  BOTTOM w0.3: C4.1 13.65,8.83 13.36,8.54 13.36,8.52 13.29,8.45
  vias: v1(8.84,11.05) v1(8.84,9.45) v1(11.62,10.86) v1(11.69,12.55) v1(12.31,10.85) v1(12.42,13) v1(12.69,12.75) v1(12.73,10.87) v1(13.21,13.75) v2(8.84,11.05) v2(8.84,9.45) v2(11.62,10.86) v2(11.69,12.55) v2(12.31,10.85) v2(12.42,13) v2(12.69,12.75) v2(12.73,10.87) v2(13.21,13.75) v3(8.84,11.05) v3(8.84,9.45) v3(11.62,10.86) v3(11.69,12.55) v3(12.31,10.85) v3(12.42,13) v3(12.69,12.75) v3(12.73,10.87) v3(13.21,13.75) v4(8.84,11.05) v4(8.84,9.45) v4(11.62,10.86) v4(11.69,12.55) v4(12.31,10.85) v4(12.42,13) v4(12.69,12.75) v4(12.73,10.87) v4(13.21,13.75)
SCL: length 8.6
  SIGNAL_1 w0.089: v3(9.64,10.65) 8.94,9.95 6.79,9.95 v2(6.59,9.75) 6.33,10.01 4.44,10.01 v2(4.19,9.75)
  SIGNAL_2 w0.089: v3(9.64,10.65) 9.89,10.91 9.89,12.41 v3(9.44,12.87)
SDA: length 9.9
  TOP w0.178: v2(6.19,9.75) 6.19,9.65 5.95,9.41 4.05,9.41 3.79,9.67 U2.A2
  SIGNAL_1 w0.089: v2(6.19,9.75) 6.44,9.49 8.43,9.49 8.69,9.75 9.14,9.75 v3(9.64,10.25)
  SIGNAL_2 w0.089: v3(9.64,10.25) 10,10.25 10.29,10.54 10.29,11.74 10.09,11.95 v3(10.09,12.87)
TX_CLKIN: length 1.2
  BOTTOM w0.178: v5(10.04,9.45) v5(10.04,10.65)
UART_RX: length 4
  SIGNAL_2 w0.089: v5(7.77,13.97) 7.77,13.86 7.47,13.56 7.47,12.01 v3(8.84,10.65)
UART_TX: length 1.6
  SIGNAL_1 w0.089: v2(8.84,10.25) 8.04,10.25 7.98,10.31 v5(7.28,10.31)
UNNAMED_2_CAP_I50_1: length 2.9
  TOP w0.178: C8.1 C7.1
  TOP w0.25: FB1.2 12.01,8.53 C7.1 U4.F7
UNNAMED_2_LED_I88_BK: length 21.4
  BOTTOM w0.127: R21.1 7.12,8.49 7,8.36 7,6.66 7.6,6.05 12.26,6.05 13.37,7.15 14.39,7.15 14.75,6.79 14.75,4.09 16.79,2.05 21.69,2.05
UNNAMED_2_LED_I88_GK: length 19.3
  SIGNAL_2 w0.127: v5(18.32,1.74) 17.86,1.74 15.89,3.71 15.89,5.96 16.14,6.22 16.14,8.08 v5(16.16,8.1)
  BOTTOM w0.127: R20.1 9.79,9.15 10.56,9.15 10.56,9.15 12.61,9.15 13.29,9.83 15.21,9.83 16.16,8.88 v5(16.16,8.1) ; v5(18.32,1.74) 18.51,1.55 20.99,1.55 21.09,1.45
UNNAMED_2_LED_I88_RK: length 13.2
  BOTTOM w0.127: R19.1 14.99,7.35 15.43,6.9 15.43,3.9 16.99,2.35 20.99,2.35 21.39,2.75 21.79,2.75 22.29,2.25 22.29,1.45
UNNAMED_2_LED_I99_BK: length 8.1
  TOP w0.127: 21.09,1.45 18.12,1.45 15.29,4.28 15.29,4.45 15.09,4.65 v5(15.09,5.35)
  BOTTOM w0.127: R28.1 v5(15.09,5.35)
UNNAMED_2_LED_I99_GK: length 10.9
  TOP w0.127: v5(16.89,3.15) 16.89,3.09 17.83,2.15 21.59,2.15 21.69,2.05
  BOTTOM w0.127: v5(16.89,3.15) 15.69,4.35 15.69,7.25 15.59,7.35 R27.1
UNNAMED_2_LED_I99_RK: length 16
  TOP w0.127: 21.69,0.85 21.6,0.77 v3(18.91,0.77)
  SIGNAL_2 w0.127: v5(11.99,6.75) 12.29,6.75 12.29,6.76 12.75,7.22 14.15,7.22 14.79,6.58 14.79,5.15 15.04,4.9 15.04,3.22 17.49,0.77 v3(18.91,0.77)
  BOTTOM w0.127: R26.1 11.46,7.57 11.99,7.05 v5(11.99,6.75)
UNNAMED_2_PMDXB600UNE_I30_D11: length 1.5
  TOP w0.178: Q2.6 14.74,13.39 14.76,13.36 14.76,13.15
  TOP w0.203: R13.2 13.92,13.6 Q2.6
UNNAMED_2_PMDXB600UNE_I31_D21: length 1.3
  TOP w0.178: R14.2 15.37,12.26 15.44,12.33 Q2.3 15.44,13.03 Q2.8
UNNAMED_2_PMDXB600UNE_I36_D11: length 4.2
  TOP w0.178: Q3.6 14.76,15.38 14.76,15.16 14.76,14.95
  TOP w0.203: Q3.6 14.45,15.69 11.83,15.69 11.59,15.45 R15.2
UNNAMED_2_PMDXB600UNE_I38_D21: length 2.3
  TOP w0.178: R16.2 13.99,15.03 13.99,15.05 v2(14.29,15.35) ; Q3.3 15.44,14.83 v2(15.31,14.95)
  SIGNAL_1 w0.2: v2(15.31,14.95) 15.06,14.95 14.66,15.35 v2(14.29,15.35)
USB_B_DM: length 4.7
  SIGNAL_2 w0.102: v3(8.24,6.65) 8.24,7.02 8.43,7.17 8.43,8.01 7.99,8.45 7.99,9.56 8.73,10.3 8.73,10.39 8.47,10.65 v3(8.44,10.65)
USB_B_DP: length 4.7
  SIGNAL_2 w0.102: v3(9.24,10.65) 8.93,10.34 8.93,10.22 8.19,9.48 8.19,8.53 8.64,8.09 8.64,7.1 8.89,6.84 v3(8.89,6.65)
USB_B_ID: length 5.7
  SIGNAL_2 w0.089: v3(9.49,6.55) 9.32,6.39 8.05,6.39 7.89,6.55 7.89,7.05 6.27,8.67 v5(5.79,8.67)
  BOTTOM w0.178: Q4.G 5.71,8.6 v5(5.79,8.67)
USB_B_VBUS: length 30.7
  TOP w0.25: 22.29,1.45 22.39,1.45 v5(22.89,1.95) ; C1.1 15.85,8.16 v3(15.58,7.89)
  TOP w0.3: U3.4 15.1,8.75 15.11,8.74 15.11,8.51 15.1,8.5 U3.3 15.18,8.29 v3(15.58,7.89)
  SIGNAL_2 w0.3: 15.49,7.8 15.49,3.48 17.65,1.31 18.55,1.31 19.29,2.05 22.4,2.05 22.5,1.95 v5(22.89,1.95) ; 15.49,7.8 v3(15.58,7.89) ; 15.49,7.8 15.25,7.56 12.1,7.56 v5(11.14,6.6) ; v5(6.19,8.05) v5(7.49,6.75)
  BOTTOM w0.178: R23.1 R22.1 6.01,9.23 6.19,9.05 v5(6.19,8.05)
  BOTTOM w0.25: 21.69,0.85 22.36,0.85 22.89,1.37 v5(22.89,1.95)
  BOTTOM w0.3: v5(7.49,6.75) 7.69,6.55 11.09,6.55 v5(11.14,6.6)
USB_B_VBUS_CONN: length 5.9
  TOP w0.3: CN1.1 7.59,6.14 7.29,5.84 5.49,5.84 5.19,6.14 FB2.1 5.17,8.03 4.22,8.03 D1.K
USB_C_CC1: length 39.2
  TOP w0.178: v3(9.76,15.45) 10.08,15.45 Q1.6 10.14,14.98 Q1.7
  TOP w0.25: v3(16.06,12.68) 15.98,12.6 15.98,11.02 15.99,11.02 15.99,9.7 16.25,9.44 16.25,8.87 16.57,8.55 16.74,8.55 16.74,8.55 17.39,8.55 J2.A5
  TOP w0.3: v3(5.17,9.03) 5.16,9.04 3.89,9.04 3.59,9.35 3.22,9.35 3.09,9.48 J1.A5
  TOP w0.32: v3(5.17,9.03) v3(5.43,9.03)
  SIGNAL_1 w0.25: v3(10.78,13.53) 11.27,13.53 v3(11.33,13.47)
  SIGNAL_1 w0.3: v3(10.78,13.53) v3(10.48,13.53)
  SIGNAL_2 w0.089: 9.89,14.15 9.79,14.25 9.79,15.15 9.76,15.17
  SIGNAL_2 w0.25: v3(11.33,13.47) 11.33,15.09 11.92,15.68 16.98,15.68 18.04,14.62 18.04,13.32 17.4,12.68 v3(16.06,12.68)
  SIGNAL_2 w0.3: v3(5.17,9.03) 5.32,9.18 5.32,9.79 5.72,10.19 5.72,10.37 5.72,10.38 5.72,15.28 6.29,15.85 9.45,15.85 9.75,15.55 9.75,15.47 v3(9.76,15.45) ; 9.89,14.12 9.89,13.65 10.05,13.49 10.43,13.49 v3(10.48,13.53) v3(10.78,13.53)
  SIGNAL_2 w0.32: v3(5.43,9.03) v3(5.17,9.03) ; v3(9.76,15.45) 9.76,15.06 9.89,14.93 9.89,14.12
USB_C_CC2_N: length 5.5
  SIGNAL_2 w0.102: v5(5.36,15.09) 4.87,14.6 4.87,14.4 4.87,13.92 4.85,13.89 4.85,13.84 4.7,13.69 4.65,13.69 4.47,13.51 4.47,10.79 4.37,10.69 4.3,10.69 4.3,10.69 4.08,10.69 4.08,10.69 4.05,10.69 v3(3.79,10.95)
USB_C_CC2_P: length 5.5
  TOP w0.157: v3(4.19,10.95) 4.12,11.02 4.12,11.09 3.92,11.28 3.65,11.28 3.46,11.09 3.39,11.02 U2.D3
  SIGNAL_2 w0.102: v5(3.61,15.09) 3.99,14.71 3.99,12.85 4.19,12.65 4.19,11.24 4.19,11.24 v3(4.19,10.95)
USB_C_DM: length 19.5
  TOP w0.157: v2(2.06,10.48) J1.A7
  SIGNAL_1 w0.102: v2(18.79,9.05) 18.79,9.15 18.59,9.35 17.59,9.35 v2(17.39,9.55) 17.24,9.4 15.4,9.4 14.11,8.11 9.91,8.11 9.46,8.57 5.95,8.57 5.8,8.72 4.43,8.72 3.75,9.41 3.33,9.41 2.39,10.34 2.19,10.34 v2(2.06,10.48)
USB_C_DP: length 19.5
  TOP w0.157: v2(2.06,9.98) J1.A6
  SIGNAL_1 w0.102: v3(17.39,9.05) 17.24,9.2 15.49,9.2 14.2,7.91 14.16,7.91 9.83,7.91 9.37,8.37 5.87,8.37 5.71,8.52 4.35,8.52 3.66,9.21 3.24,9.21 2.31,10.14 2.18,10.14 2.06,10.03 v2(2.06,9.98)
  SIGNAL_2 w0.102: v3(18.79,9.55) 18.59,9.35 17.69,9.35 v3(17.39,9.05)
USB_C_PLUG_CC2: length 4.6
  BOTTOM w0.32: R2.2 3.61,11.34 3.25,10.98 J1.B5
USB_C_PLUG_VBUS: length 7
  TOP w0.178: v5(3.29,8.89) 3.23,8.95 2.99,8.95
  TOP w0.2: v5(3.56,8.83) 3.35,8.83
  TOP w0.32: 3.35,8.83 v5(3.29,8.89) 3.05,8.89 2.99,8.95 v5(2.69,8.95) 2.67,8.97 v5(2.39,8.97) 1.79,8.97 1.79,8.98 J1.A4 ; J1.A9 v5(2.41,11.48) 2.39,11.45
  BOTTOM w0.178: v5(3.56,8.83) 3.5,8.89 v5(3.29,8.89)
  BOTTOM w0.32: J1.A4 1.79,8.98 1.79,8.97 v5(2.39,8.97) 2.67,8.97 v5(2.69,8.95) 3.47,8.95 3.56,8.85 v5(3.56,8.83)
  vias: v1(2.09,11.45) v1(2.79,11.45) v1(3.09,11.65) v1(4.25,13.96) v1(4.59,15.35) v1(4.59,15.05) v1(4.59,14.65) v1(4.61,14.29) v1(4.59,13.95) v1(4.94,15.03) v2(2.09,11.45) v2(2.79,11.45) v2(3.09,11.65) v2(4.25,13.96) v2(4.59,15.35) v2(4.59,15.05) v2(4.59,14.65) v2(4.61,14.29) v2(4.59,13.95) v2(4.94,15.03) v3(2.09,11.45) v3(2.79,11.45) v3(3.09,11.65) v3(4.25,13.96) v3(4.59,15.35) v3(4.59,15.05) v3(4.59,14.65) v3(4.61,14.29) v3(4.59,13.95) v3(4.94,15.03) v4(2.09,11.45) v4(2.79,11.45) v4(3.09,11.65) v4(4.25,13.96) v4(4.59,15.35) v4(4.59,15.05) v4(4.59,14.65) v4(4.61,14.29) v4(4.59,13.95) v4(4.94,15.03) v5(2.09,11.45) v5(2.79,11.45) v5(3.09,11.65)
USB_C_RECEP_CC2: length 22
  TOP w0.178: v2(10.84,14.5) 10.84,14.83 Q1.8
  SIGNAL_1 w0.25: v2(18.79,10.05) 18.88,10.14 19.15,10.14 19.26,10.26 19.26,12.06 18.18,13.15 18.18,14.3 17.83,14.64 16.28,14.64 16.25,14.61 14.56,14.61 14.16,15.01 14.15,15.01 13.78,15.38 11.72,15.38 v2(10.84,14.5)
  SIGNAL_1 w0.3: v2(10.84,14.5) 10.45,14.88 9.99,14.88 9.78,14.67 9.78,14.41 9.55,14.19 9.12,14.19 9,14.3 9,14.36 8.79,14.57 8.74,14.57 8.27,15.03 7.11,15.03 6.84,15.31 6.04,15.31 5.48,14.76 5.48,14.4 v5(5.36,14.28) v5(5.36,13.9) v5(5.36,13.54)
  BOTTOM w0.32: R2.1 v5(5.36,13.54)
USB_C_RECEP_VBUS: length 0.1
  TOP w0.3: J2.A9 17.52,10.55 v5(17.53,10.54)
  vias: v1(6.19,14.95) v1(6.19,14.64) v1(6.19,14.35) v1(6.19,13.95) v1(6.19,13.55) v1(6.53,14.64) v1(6.54,13.95) v1(6.69,14.95) v1(6.66,14.29) v1(6.69,13.55) v1(17.23,10.5) v1(17.2,7.99) v1(17.55,8) v1(18.63,10.5) v1(18.59,8.05) v1(18.93,10.54) v1(18.89,8.05) v2(6.19,14.95) v2(6.19,14.64) v2(6.19,14.35) v2(6.19,13.95) v2(6.19,13.55) v2(6.53,14.64) v2(6.54,13.95) v2(6.69,14.95) v2(6.66,14.29) v2(6.69,13.55) v2(17.23,10.5) v2(17.2,7.99) v2(17.55,8) v2(18.63,10.5) v2(18.59,8.05) v2(18.93,10.54) v2(18.89,8.05) v3(6.19,14.95) v3(6.19,14.64) v3(6.19,14.35) v3(6.19,13.95) v3(6.19,13.55) v3(6.53,14.64) v3(6.54,13.95) v3(6.69,14.95) v3(6.66,14.29) v3(6.69,13.55) v3(17.23,10.5) v3(17.2,7.99) v3(17.55,8) v3(18.63,10.5) v3(18.59,8.05) v3(18.93,10.54) v3(18.89,8.05) v4(6.19,14.95) v4(6.19,14.64) v4(6.19,14.35) v4(6.19,13.95) v4(6.19,13.55) v4(6.53,14.64) v4(6.54,13.95) v4(6.69,14.95) v4(6.66,14.29) v4(6.69,13.55) v4(17.23,10.5) v4(17.2,7.99) v4(17.55,8) v4(18.63,10.5) v4(18.59,8.05) v4(18.93,10.54) v4(18.89,8.05) v5(6.19,14.95) v5(6.19,14.64) v5(6.19,14.35) v5(6.19,13.95) v5(6.19,13.55) v5(6.53,14.64) v5(6.54,13.95) v5(6.69,14.95) v5(6.66,14.29) v5(6.69,13.55) v5(16.79,15.75) v5(16.79,15.25) v5(16.79,14.75) v5(17.19,15.75) v5(17.19,15.25) v5(17.19,14.75) v5(17.23,10.5) v5(17.2,7.99) v5(17.59,15.75) v5(17.59,15.25) v5(17.59,14.75) v5(17.55,8) v5(18.63,10.5) v5(18.59,8.05) v5(18.93,10.54) v5(18.89,8.05)
USB_C_RFU1: length 25.3
  TOP w0.127: J2.A8 17,10.05 v3(16.67,9.72)
  TOP w0.178: J1.A8 2.87,10.98 3.22,11.32 3.22,11.32 3.45,11.55 3.5,11.55 3.53,11.58 4.05,11.58 4.07,11.55 4.5,11.55 4.65,11.4 4.95,11.4 v3(4.99,11.36)
  SIGNAL_1 w0.089: v3(18.11,12.08) 17.89,12.3 17.89,12.66 17.53,13.01 16.29,13.01 15.93,13.37 15.21,13.37 15.19,13.35 14.73,13.35 14.39,13.69 13.51,13.69 13.31,13.49 11.67,13.49 11.35,13.81 10.36,13.81 10.23,13.69 7.54,13.69 7.03,13.17 v3(5.02,13.17)
  SIGNAL_2 w0.089: v3(4.99,11.36) 4.99,13.14 v3(5.02,13.17) ; v3(16.67,9.72) 16.7,9.75 18.07,9.75 18.34,10.02 18.34,11.52 18.11,11.76 v3(18.11,12.08)
USB_C_RFU2: length 19.6
  SIGNAL_1 w0.089: v5(4.24,8.22) 4.66,7.79 6.08,7.79 6.86,7.79 7.08,7.57 8.12,7.57 8.2,7.65 14.89,7.65 15.79,8.55 v2(18.79,8.55)
  BOTTOM w0.178: v5(4.24,8.22) 4.24,9.26 3.95,9.56 1.19,9.56 1.11,9.48 J1.B8
USB_C_SSRX1_N: length 19.2
  TOP w0.157: v5(6.26,6.55) 6.28,6.53 6.87,7.12 6.87,7.2 7.16,7.49 10.62,7.49 10.62,7.48 16.42,7.48 16.49,7.55 v3(16.61,7.55)
  SIGNAL_2 w0.102: v3(18.79,7.55) 18.54,7.55 18.39,7.4 16.99,7.4 16.84,7.55 v3(16.61,7.55)
  BOTTOM w0.157: J1.B10 2.02,8.48 2.13,8.37 3.57,8.37 5.42,6.52 6.27,6.52 6.27,6.54 v5(6.26,6.55)
USB_C_SSRX1_P: length 19.2
  TOP w0.157: v5(6.43,6.25) 6.43,6.28 7.16,7.01 7.16,7.09 7.28,7.21 10.5,7.21 10.5,7.2 16.34,7.2 16.49,7.05 v3(16.59,7.05)
  SIGNAL_2 w0.102: v3(18.79,7.05) 18.54,7.05 18.39,7.2 16.99,7.2 16.84,7.05 v3(16.59,7.05)
  BOTTOM w0.157: J1.B11 2.02,7.98 2.13,8.08 3.45,8.08 5.3,6.24 6.39,6.24 6.4,6.25 v5(6.43,6.25)
USB_C_SSRX2_N: length 16.8
  TOP w0.157: J1.A10 1.39,11.98 1.39,11.98 2.03,11.98 2.13,12.08 v2(2.15,12.08)
  SIGNAL_1 w0.102: v2(2.15,12.08) 2.4,12.06 2.5,12.15 3.44,12.15 3.68,12.39 11.13,12.39 11.44,12.08 15.9,12.08 16.79,11.19 17.08,11.19 v2(17.21,11.06)
USB_C_SSRX2_P: length 16.8
  TOP w0.157: J1.A11 v2(2.17,12.48)
  SIGNAL_1 w0.102: v2(2.17,12.48) 2.42,12.46 2.51,12.36 3.36,12.36 3.59,12.59 11.21,12.59 11.52,12.28 15.98,12.28 16.87,11.39 17.05,11.39 v2(17.21,11.55)
USB_C_SSTX1_N: length 17.4
  SIGNAL_1 w0.102: v2(17.39,7.55) 16.95,7.11 16.95,6.94 16.8,6.79 15.15,6.79 14.62,7.32 2.82,7.32 1.79,8.34 1.22,8.34 v2(1.09,8.48)
USB_C_SSTX1_P: length 17.4
  SIGNAL_1 w0.102: v2(1.09,7.98) 1.09,8.04 1.19,8.14 1.71,8.14 2.73,7.12 14.53,7.12 15.07,6.58 17.05,6.58 17.15,6.69 17.15,6.95 17.25,7.05 v2(17.39,7.05)
USB_C_SSTX2_N: length 21.2
  SIGNAL_1 w0.102: v2(18.79,11.05) 18.54,11.05 18.39,11.2 18.2,11.2 18.1,11.1 18.1,10.22 17.88,10 16.27,10 16.02,10.25 16.02,10.97 15.62,11.38 10.5,11.38 10.09,11.78 9.72,11.78 9.58,11.64 4.11,11.64 3.45,10.98 1.89,10.98 1.56,11.32 1.56,12.01 1.46,12.11 1.24,12.11 v5(1.1,11.98)
USB_C_SSTX2_P: length 21.2
  SIGNAL_1 w0.102: v2(18.79,11.55) 18.54,11.55 18.39,11.4 18.12,11.4 17.9,11.18 17.9,10.31 17.8,10.21 16.35,10.21 16.23,10.33 16.23,11.06 15.7,11.58 10.58,11.58 10.18,11.99 9.64,11.99 9.49,11.85 4.02,11.85 3.37,11.19 1.98,11.19 1.76,11.41 1.76,12.1 1.54,12.32 1.26,12.32 v5(1.1,12.48)
USB_C_VBUS_N: length 2.4
  TOP w0.157: R1.4 6.36,11.85 6.21,11.7 5.79,11.7 5.63,11.54 5.63,11.35 5.7,11.28 5.7,11.28 5.92,11.28 6.12,11.09 6.12,11.02 U1.D2
USB_C_VBUS_P: length 3.2
  TOP w0.157: R1.3 4.61,11.85 4.77,11.7 5.19,11.7 5.35,11.54 5.35,11.08 5.47,10.95 v2(5.79,10.95)
  SIGNAL_1 w0.102: v2(5.79,10.95) v2(6.59,10.95)

## Copper pours and planes (outline as drawn; the poured copper is in the pictures)
GND on TOP: 0.59,7.65 3.89,7.65 4.69,6.85 4.69,0.25 3.49,0.25 3.09,0.65 3.09,5.95 1.69,7.35 0.59,7.35
GND on TOP: 0.79,12.85 2.29,12.85 2.49,13.05 2.49,13.65 2.39,13.75 2.29,13.75 1.69,13.41 1.69,13.15 0.79,13.15
GND on BOTTOM: 0.79,12.85 2.29,12.85 2.49,13.05 2.49,13.65 2.39,13.75 2.29,13.75 1.94,13.55 1.34,13.15 0.79,13.15
GND on BOTTOM: 0.69,7.65 0.69,7.35 1.69,7.35 3.09,5.95 3.09,0.65 3.39,0.35 4.69,0.35 4.69,6.45 3.49,7.65
GND on GND1: 0.42,13.05 1.29,13.05 1.49,13.25 1.69,13.25 1.69,14.45 2.99,14.45 2.99,15.65 3.39,16.05 23.89,16.05 24.19,15.75 24.19,14.25 19.59,14.25 19.59,4.35 24.19,4.35 24.19,2.45 21.89,0.15 13.09,0.15 13.09,5.65 4.69,5.65 4.69,0.25 3.39,0.25 2.99,0.65 2.99,5.95 1.59,7.35 0.42,7.35 ; 1 cut-out
GND on PWR1: 0.4,13.12 1.69,13.12 1.69,9.25 2.39,8.55 3.69,8.55 4.79,7.45 6.99,7.45 7.09,7.55 7.09,9.65 8.19,10.75 9.29,10.75 9.39,10.65 9.39,10.45 8.49,9.55 8.49,9.15 8.69,8.95 14.09,8.95 14.99,9.85 14.99,13.35 15.19,13.55 16.29,13.55 16.99,14.25 17.99,14.25 17.99,16.05 23.89,16.05 24.29,15.65 24.29,14.35 24.19,14.25 19.59,14.25 19.49,14.15 19.49,12.05 19.59,11.95 19.59,7.48 19.54,7.44 19.54,4.59 19.5,4.54 19.69,4.35 24.19,4.35 24.19,2.65 21.79,0.25 13.09,0.25 13.09,5.75 4.69,5.75 4.69,0.35 3.39,0.35 3.09,0.65 3.09,5.95 1.69,7.35 0.4,7.35
PP3300 on TOP: 10.69,11.55 10.69,10.95 10.79,10.85 11.39,10.85 11.59,10.65 12.94,10.65 13.15,10.44 13.15,9.94 13.43,9.94 13.69,10.2 13.69,10.87 13.3,11.26 12.87,11.26 12.79,11.35 12.79,12.15 12.89,12.25 12.89,13.15 12.19,13.15 11.99,12.95 11.99,12.85 11.89,12.75 11.39,12.75 11.39,12.25
PP3300 on PWR1: 3.99,8.55 4.89,7.65 6.89,7.65 6.89,9.75 8.09,10.95 9.49,10.95 9.59,10.85 9.59,10.35 8.69,9.45 8.69,9.25 8.79,9.15 13.79,9.15 14.79,10.15 14.79,12.55 13.09,14.25 10.09,14.25 8.87,13.03 5.17,13.03 3.99,11.85
USB_C_PLUG_VBUS on TOP: 4.09,13.05 5.09,13.05 5.19,13.15 5.19,15.95 5.09,16.05 3.39,16.05 3.09,15.75 3.09,14.45 2.69,14.05 2.69,12.95 1.89,12.15 1.89,11.25 3.03,11.25 3.93,12.16 3.93,12.9
USB_C_PLUG_VBUS on BOTTOM: 0.62,11.65 1.76,11.65 2.03,11.92 3.2,11.92 3.28,11.83 3.28,11.5 3.1,11.31 0.61,11.31 0.61,11.64
USB_C_PLUG_VBUS on PWR1: 5.19,13.35 3.79,11.95 3.79,8.75 2.44,8.75 1.89,9.3 1.89,13.25 3.09,14.45 3.09,15.75 3.39,16.05 5.19,16.05
USB_C_RECEP_VBUS on BOTTOM: 19.49,15.95 19.39,16.05 6.69,16.05 6.09,15.45 6.09,11.35 6.39,11.05 9.79,11.05 10.09,11.35 10.09,12.45 10.49,12.85 11.69,12.85 12.09,12.45 12.09,11.55 12.79,10.85 13.09,10.85 14.09,9.85 15.09,9.85 16.39,8.55 16.39,7.85 16.09,7.85 16.09,6.65 16.19,6.55 19.39,6.55 19.49,6.65
USB_C_RECEP_VBUS on PWR1: 17.79,16.05 5.69,16.05 5.39,15.75 5.39,13.35 5.5,13.24 8.67,13.24 9.89,14.45 13.29,14.45 13.69,14.05 16.49,14.05 16.89,14.45 17.79,14.45

Small or netless copper shapes (teardrops, artwork), in the pictures only: 1 on TOP, 1 on BOTTOM

## Text on the board
Board Geometry/Soldermask Bottom: 180- | SOLDERMASK BOTTOM
Package Geometry/Pastemask Bottom: 180- | PASTEMASK BOTTOM
Ref Des/Silkscreen Bottom: TX | RX | XIN | NRST | XOUT | TWINKIE | V2 | SILKSCREEN BOTTOM
Board Geometry/Soldermask Top: 180- | SOLDERMASK TOP
Package Geometry/Pastemask Top: 180- | PASTEMASK TOP
Ref Des/Silkscreen Top: 180- | SILKSCREEN TOP
XSECTION_CHART: *  SURFACE - AIR 0 MM | L1: TOP CONDUCTOR - COPPER 0.0356 MM | *  DIELECTRIC - FR-4 0.1 MM | L2: GND1 PLANE - COPPER 0.0178 MM | *  DIELECTRIC - FR-4 0.0762 MM | L3: SIGNAL_1 CONDUCTOR - COPPER 0.0178 MM | L4: SIGNAL_2 CONDUCTOR - COPPER 0.0178 MM | L5: PWR1 PLANE - COPPER 0.0178 MM | L6: BOTTOM CONDUCTOR - COPPER 0.0356 MM | TOTAL: .6MM +/- 10% | 1-6 | 1-2 | 2-3 | 3-4 | 4-5 | 5-6
User.11: 6.35
User.12: J1 | D1 | CN1 | TP2 | TP1 | TP5 | TP4 | TP3 | R1 | U2 | FB2 | U1 | U4 | C3 | C2 | FB1 | C8 | C7 | R14 | Q3 | J2 | DS2 | DS1 | R2 | Q4 | C6 | R24 | R25 | R18 | C5 | R7 | R3 | R9 | Q1 | R15 | R10 | R12 | R16 | R13 | C1 | Q2 | U5 | R27 | R28 | R19 | R4 | C4 | R6 | R8 | R26 | R5 | R20 | R17 | R21 | R11 | R22 | R23 | TOP VIEW | BOTTOM VIEW | ASSEMBLY DRAWING
User.13: 2. Impedance Control: | a  .157 traces on top and bottom to be 85ohm +/- 10% | b. .1016mm traces on internal layers 3 and 4 to be 85ohm +/- 10% | c. All vias to be plugged. | d. All BGA vias and test points vias are to be free of soldermask. | 1.55 | 1.563 | 1.281 | 2.106 | 7.9 | 21.611 | 9.105 | 4.455 | 2.85 | 1.225 | 7.05 | 6.35 | 9.5 | 16.25 | 180-10114 | FAB DRAWING
User.14: FIGURE | SIZE | 0.1 | DRILL CHART: TOP to GND1 | ALL UNITS ARE IN MILLIMETERS | TOLERANCE | +0.076/-0.1 | PLATED | QTY | 221
User.15: FIGURE | SIZE | 0.65 | 1.1x0.5 | 1.3x0.6 | 1.5x0.5 | 1.6x0.6 | 0.95x0.65 | DRILL CHART: TOP to BOTTOM | ALL UNITS ARE IN MILLIMETERS | TOLERANCE | +0.076/-0.076 | +0.1/-0.1 | PLATED | NON-PLATED | QTY | 1 | 2 | 4
User.16: FIGURE | SIZE | 0.1 | DRILL CHART: PWR1 to BOTTOM | ALL UNITS ARE IN MILLIMETERS | TOLERANCE | +0.076/-0.1 | PLATED | QTY | 97
User.17: FIGURE | SIZE | 0.1 | DRILL CHART: SIGNAL_2 to PWR1 | ALL UNITS ARE IN MILLIMETERS | TOLERANCE | +0.076/-0.1 | PLATED | QTY | 110
User.18: FIGURE | SIZE | 0.1 | DRILL CHART: SIGNAL_1 to SIGNAL_2 | ALL UNITS ARE IN MILLIMETERS | TOLERANCE | +0.0762/-0.1 | PLATED | QTY | 159
User.19: FIGURE | SIZE | 0.1 | DRILL CHART: GND1 to SIGNAL_1 | ALL UNITS ARE IN MILLIMETERS | TOLERANCE | +0.0762/-0.1 | PLATED | QTY | 176
